# EAGLE board ADUM1250 (EAGLE 7.1.0)
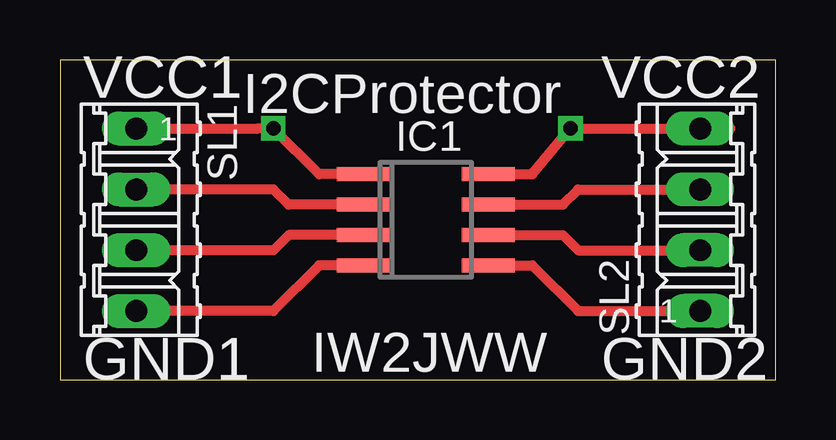
[diagram p0: board, top side]
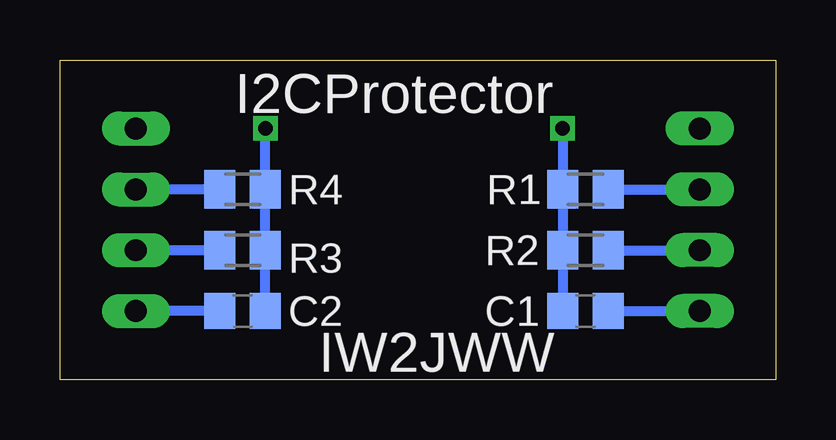
[diagram p1: board, bottom side, seen from below]

Size 29.83 x 13.33 mm. Coordinates in mm from the lower left corner, seen from the top.
Outline: 0,0 29.83,0 29.83,13.33 0,13.33 0,0
Copper layers (1*16): Top 0.035mm / dielectric 1.5mm / Bottom 0.035mm
Design rules "default": minimum track width 10mil, minimum drill 24mil, track to track 8mil, track to pad 8mil, pad to pad 8mil, via to via 8mil, smd to smd 8mil, copper to edge 40mil, drill to drill 8mil, minimum pad ring 10mil, minimum via ring 8mil, stop-mask expansion 4mil, vias tented up to drill 0mil, thermal gap 10mil

## Footprints (pad centres in the part's own frame; a part is rotated, then mirrored left to right if it is on the bottom)
C0805 = smd 1.3 x 1.5: 1 -0.95,0; 2 0.95,0
SO8 = smd 0.6 x 2.2: 1 -1.905,-2.6; 2 -0.635,-2.6; 3 0.635,-2.6; 4 1.905,-2.6; 5 1.905,2.6; 6 0.635,2.6; 7 -0.635,2.6; 8 -1.905,2.6
M0805 = smd 1.3 x 1.6: 1 -0.95,0; 2 0.95,0
04P = drill 0.914 long: 1 -3.81,0; 2 -1.27,0; 3 1.27,0; 4 3.81,0

## Placement (x,y rotation side)
C1  100nF  [C0805]  7.94,2.86 180 bottom
C2  100nF  [C0805]  22.23,2.86 0 bottom
IC1  ADUM1250  [SO8]  15.24,6.67 270 top
R1  3k3  [M0805]  7.94,7.94 0 bottom
R2  3k3  [M0805]  7.94,5.4 180 bottom
R3  3k3  [M0805]  22.23,5.4 0 bottom
R4  3k3  [M0805]  22.23,7.94 0 bottom
SL1  [04P]  3.18,6.67 270 top
SL2  [04P]  26.67,6.67 90 top

## Library data of the parts
C1 C2 R1-R4 = rcl
IC1 = adum1250
SL1 SL2 = con-amp-quick; OC_FARNELL: unknown; OC_NEWARK: unknown

## Nets
GND1: C1.1 IC1.4 SL1.4
GND2: C2.1 IC1.5 SL2.1
N$1: IC1.2 R1.2 SL1.2
N$2: IC1.3 R2.1 SL1.3
N$5: IC1.6 R3.1 SL2.2
N$6: IC1.7 R4.1 SL2.3
VDD1: C1.2 IC1.1 R1.1 R2.2 SL1.1
VDD2: C2.2 IC1.8 R3.2 R4.2 SL2.4

## Tracks (layer width: path | path; a pad name or v marks a point on that pad's centre or on a via)
GND1
  Top 0.406: IC1.4 10.79,4.76 8.89,2.86 SL1.4
  Bottom 0.406: C1.1 SL1.4
GND2
  Top 0.406: IC1.5 19.68,4.76 21.59,2.86 SL2.1
  Bottom 0.406: C2.1 SL2.1
N$1
  Top 0.406: SL1.2 8.89,7.94 9.53,7.3 IC1.2
  Bottom 0.406: R1.2 SL1.2
N$2
  Top 0.406: SL1.3 8.89,5.4 9.53,6.03 IC1.3
  Bottom 0.406: R2.1 SL1.3
N$5
  Top 0.406: SL2.2 21.59,5.4 20.96,6.03 IC1.6
  Bottom 0.406: R3.1 SL2.2
N$6
  Top 0.406: SL2.3 21.59,7.94 20.96,7.3 IC1.7
  Bottom 0.406: R4.1 SL2.3
VDD1  (via drill 0.6)
  Top 0.406: IC1.1 10.8,8.57 v8.89,10.48 8.25,10.48 SL1.1
  Bottom 0.406: C1.2 R2.2 R1.1 v8.89,10.48
VDD2  (via drill 0.6)
  Top 0.406: 27.94,10.48 SL2.4 v21.27,10.48 | IC1.8 19.68,8.57 | 19.68,8.57 v21.27,10.48 | 19.68,8.57 19.68,8.58 v21.27,10.48
  Bottom 0.406: C2.2 R3.2 R4.2 21.28,10.16 v21.27,10.48

## Text on the board
tNames: VCC1 | VCC2 | I2CProtector | IW2JWW | GND1 | GND2
bNames: I2CProtector | IW2JWW